# Altium PCB Mixer_8_USB_jack.PcbDoc
Units mm, origin at the board's own origin, x right, y up, seen from the top; angles counter-clockwise.
Board outline 96.08 x 38.63 mm, 2 copper layers (Top Layer, Bottom Layer); 93 components, 47 nets, 212 pads, 147 vias.
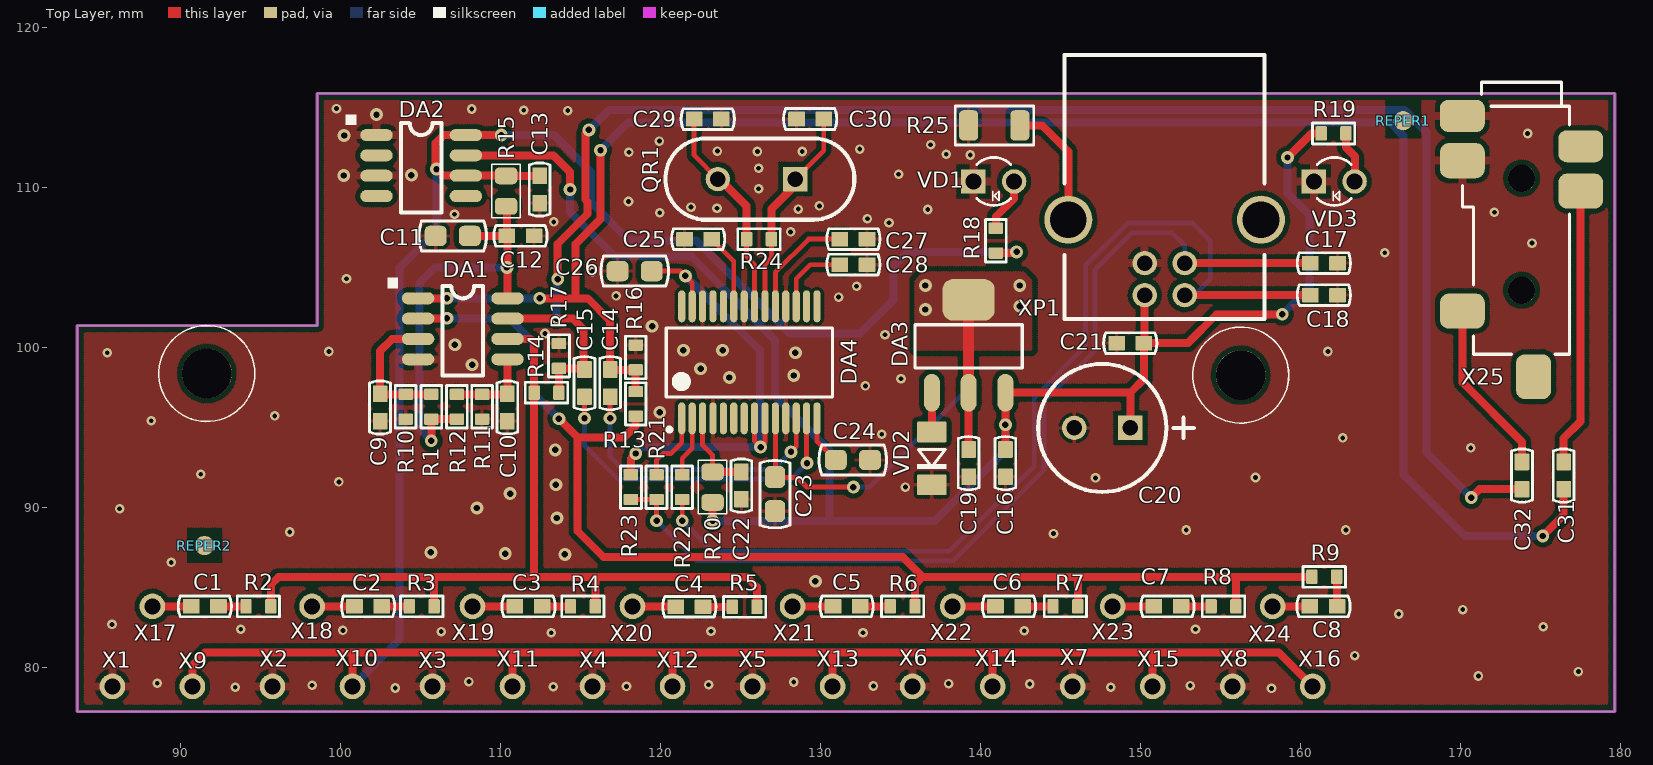
[diagram p0: Top Layer view]
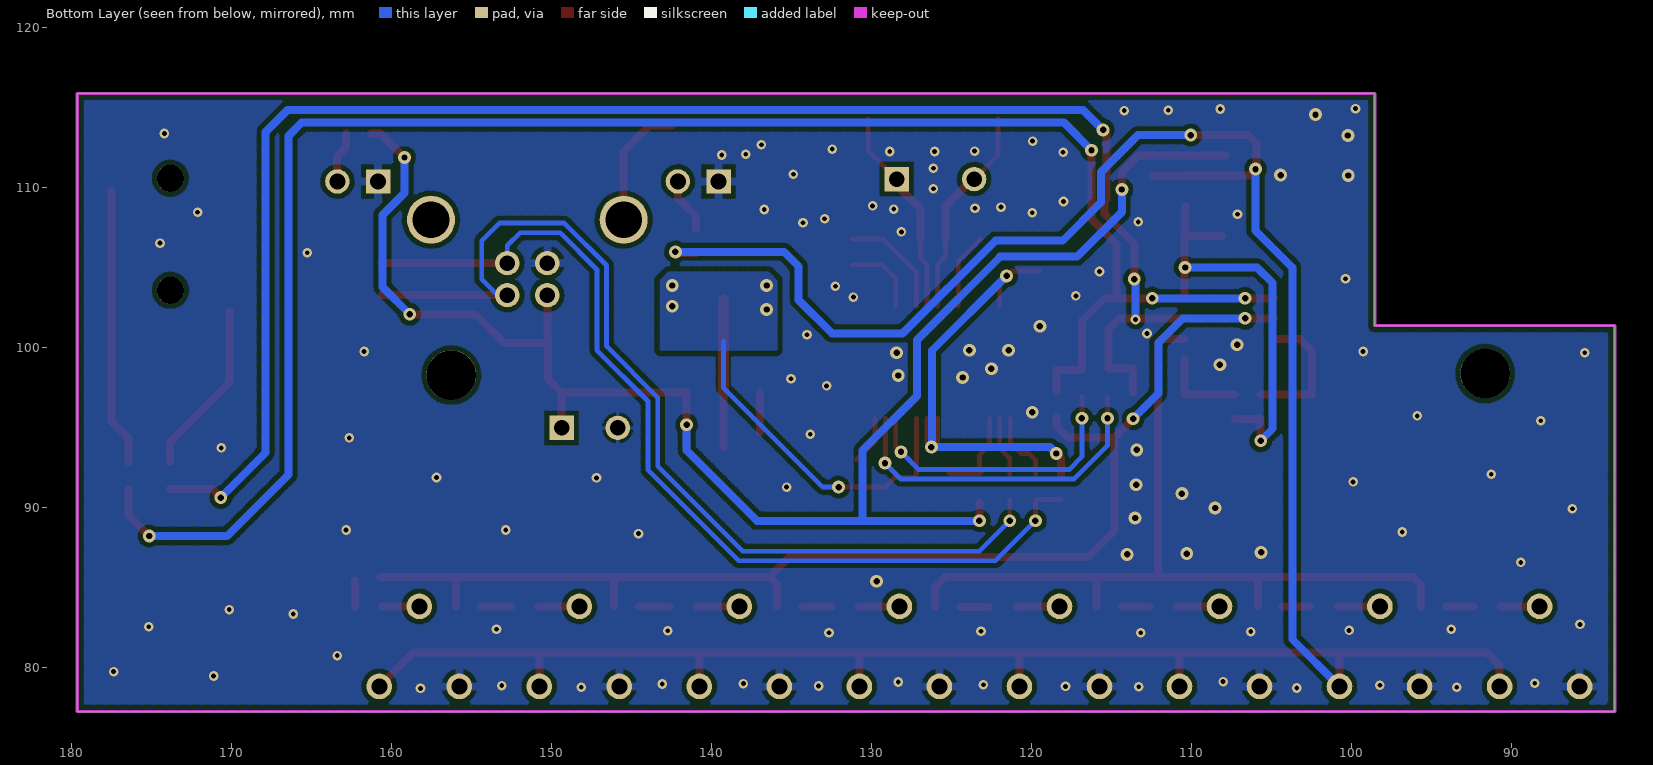
[diagram p1: Bottom Layer view, seen from below]
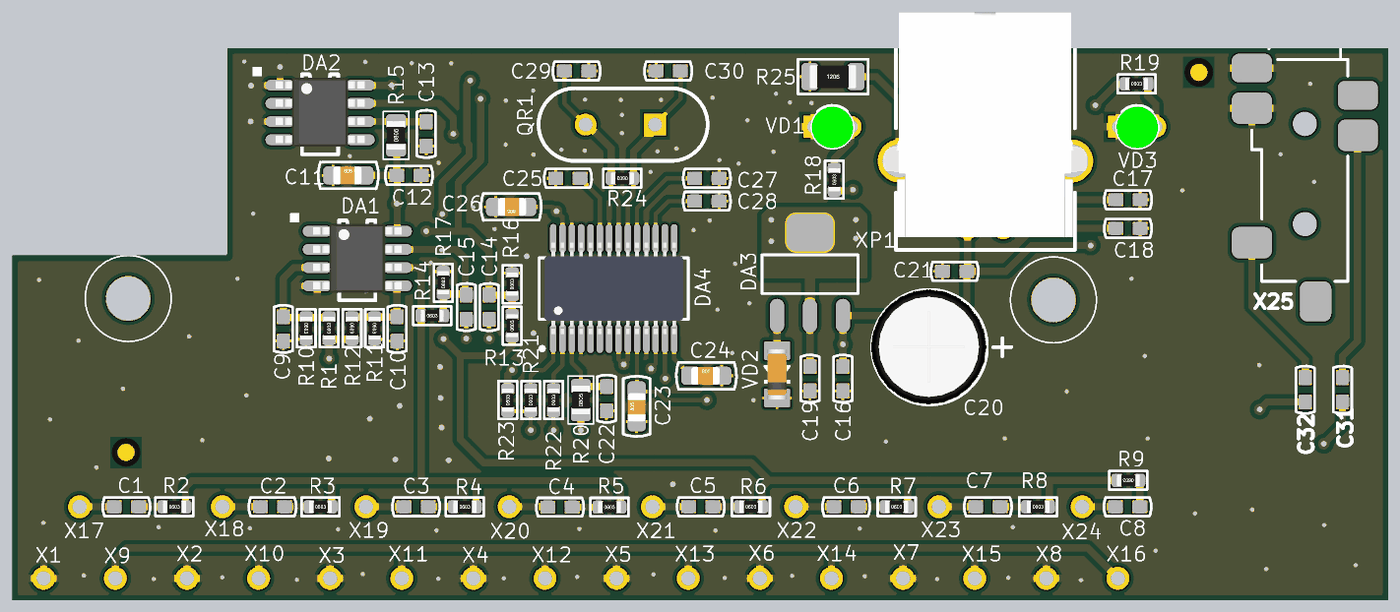
[diagram p2: 3D render of the assembled board from above, using the file's embedded part models]

## Layer stack, top to bottom
Top Solder: solder mask 0.0102, Solder Resist, Dk 3.5
Top Layer: signal copper 0.0356
Dielectric 1: dielectric 0.32, FR-4, Dk 4.8
Bottom Layer: signal copper 0.0356
Bottom Solder: solder mask 0.0102, Solder Resist, Dk 3.5

## Board outline
83.55,77.225 83.55,101.35 98.55,101.35 98.55,115.85 179.625,115.85 179.625,77.225

## Design rules (kind name [scope] priority, off if disabled: settings)
Clearance Clearance_1 [InComponent('DA4')] p1: gap=0.2
Clearance [All] p2: gap=0.3
PolygonConnect PolygonConnect_3 [InComponent('DA4')] p1: connectstyle=Relief reliefconductorwidth=0.25 reliefentries=4 polygonreliefangle="90 Angle" airgapwidth=0.25
PolygonConnect PolygonConnect_2 [InComponent('DA2') OR InComponent('DA1') OR InComponent('VD1') OR InComponent('VD3') OR InComponent('XP1') OR InComponent('X1') OR InComponent('X2') OR InComponent('X3') OR InComponent('X4') OR InComponent('X5') OR InComponent('X6') OR InComponent('X7') OR InComponent('X8') OR InComponent('X25')] p2: connectstyle=Relief reliefconductorwidth=0.5 reliefentries=4 polygonreliefangle="90 Angle" airgapwidth=0.3
PolygonConnect PolygonConnect_1 [IsVia OR (InComponent('DA3') AND InNet('+3V5'))] p3: connectstyle=Direct reliefconductorwidth=0.254 reliefentries=4 polygonreliefangle="90 Angle" airgapwidth=0.254
PolygonConnect [All] p4: connectstyle=Relief reliefconductorwidth=0.2 reliefentries=4 polygonreliefangle="90 Angle" airgapwidth=0.2
RoutingVias [All] p1: holewidth=0.4 width=0.8 viastyle="Through Hole" minholewidth=0.3 minwidth=0.6 maxholewidth=0.5 maxwidth=1
SolderMaskExpansion [All] p1: expansion=0.102
Width [All] p1: maxlimit=3 minlimit=0.2 preferedwidth=0.5
30 further rules are at their usual default settings.

## Classes and differential pairs
component class USB: C16 C17 C18 C19 C20 C21 C22 C23 C24 C25 C26 C27 C28 C29 C30 DA3 DA4 QR1 R19 R20 R21 R22 R23 R24 R25 VD2 VD3 XP1
component class Analog_out: C1 C2 C3 C4 C5 C6 C7 C8 C9 C10 C11 C12 C13 C14 C15 C31 C32 DA1 DA2 R1 R2 R3 R4 R5 R6 R7 R8 R9 R10 R11 R12 R13 R14 R15 R16 R17 R18 REPER1 REPER2 VD1 X1 X2 X3 X4 X5 X6 X7 X8 X9 X10 X11 X12 X13 X14 X15 X16 X17 X18 X19 X20 X21 X22 X23 X24 X25

## Components (designator, comment, footprint, x,y, rotation, side; value= is the part's Value field where it differs from the comment)
C1 "0.1uFx50V" CC0603-3M 91.525,83.8 r0 top
C2 "0.1uFx50V" CC0603-3M 101.725,83.8 r0 top
C3 "0.1uFx50V" CC0603-3M 111.75,83.8 r0 top
C4 "0.1uFx50V" CC0603-3M 121.8,83.775 r0 top
C5 "0.1uFx50V" CC0603-3M 131.625,83.8 r0 top
C6 "0.1uFx50V" CC0603-3M 141.775,83.8 r0 top
C7 "0.1uFx50V" CC0603-3M 151.675,83.8 r0 top
C8 "0.1uFx50V" CC0603-3M 161.425,83.8 r0 top
C9 "1uFx50V" CC0603-3M 102.475,96.225 r90 top
C10 "1uFx50V" CC0603-3M 110.425,96.225 r90 top
C11 "10uF" CC0805-MIDI-2M1 105.95,106.95 r0 top
C12 "0.1uF" CC0603-3M 111.25,106.95 r180 top
C13 "0.1uF" CC0603-3M 112.45,109.85 r90 top
C14 "1uFx50V" CC0603-3M 116.85,97.75 r270 top
C15 "1uFx50V" CC0603-3M 115.25,97.75 r270 top
C16 "0.1uF" CC0603-3M 141.55,92.75 r90 top
C17 "22pF" CC0603-3M 161.45,105.25 r180 top
C18 "22pF" CC0603-3M 161.45,103.25 r180 top
C19 "0.1uF" CC0603-3M 139.25,92.75 r90 top
C20 "470uFx10V" CC8X3.5 149.35,94.95 r180 top
C21 "0.1uF" CC0603-3M 149.35,100.25 r0 top
C22 "1uF" CC0603-3M 125.05,91.35 r90 top
C23 "10uF" CC0805-MIDI-2M1 127.15,89.75 r90 top
C24 "10uF" CC0805-MIDI-2M1 130.95,92.95 r0 top
C25 "1uF" CC0603-3M 122.35,106.75 r180 top
C26 "10uF" CC0805-MIDI-2M1 119.45,104.75 r180 top
C27 "1uF" CC0603-3M 132.05,106.748 r0 top
C28 "1uF" CC0603-3M 132.05,105.15 r0 top
C29 "22pF" CC0603-3M 122.95,114.25 r180 top
C30 "22pF" CC0603-3M 129.35,114.25 r0 top
C31 "1uFx50V" CC0603-3M 176.425,91.975 r90 top
C32 "1uFx50V" CC0603-3M 173.825,91.975 r90 top
DA1 "LM358D" SO-8 104.85,103.05 r270 top
DA2 "MIC2025-2BM" SO-8 102.25,113.25 r270 top
DA3 "NCP1117ST" SOT-223 139.25,100.05 r0 top
DA4 "PCM2904" TSSOP28 125.55,99.05 r90 top
QR1 "12MHz" HC-49 128.425,110.5 r180 top
R1 "12k" RC0603-3M 105.675,96.274 r90 top
R2 "12k" RC0603-3M 94.875,83.8 r0 top
R3 "12k" RC0603-3M 105.075,83.8 r0 top
R4 "12k" RC0603-3M 115.15,83.8 r0 top
R5 "12k" RC0603-3M 125.25,83.775 r0 top
R6 "12k" RC0603-3M 135.125,83.8 r0 top
R7 "12k" RC0603-3M 145.3,83.8 r0 top
R8 "12k" RC0603-3M 155.175,83.8 r0 top
R9 "12k" RC0603-3M 161.475,85.65 r180 top
R10 "12k" RC0603-3M 104.075,96.275 r270 top
R11 "12k" RC0603-3M 108.85,96.275 r270 top
R12 "12k" RC0603-3M 107.275,96.275 r270 top
R13 "12k" RC0603-3M 118.45,96.45 r90 top
R14 "12k" RC0603-3M 112.875,97.15 r0 top
R15 "10E" RC0805_IPC_NOM 110.35,109.75 r90 top
R16 "2k7" RC0603-3M 118.45,99.35 r90 top
R17 "2k7" RC0603-3M 113.65,99.45 r90 top
R18 "470E" RC0603-3M 140.95,106.65 r90 top
R19 "560E" RC0603-3M 162.05,113.35 r0 top
R20 "2.2E" RC0805_IPC_NOM 123.25,91.25 r90 top
R21 "22E" RC0603-3M 119.75,91.25 r90 top
R22 "22E" RC0603-3M 121.35,91.25 r90 top
R23 "1k5" RC0603-3M 118.15,91.25 r90 top
R24 "1M" RC0603-3M 126.15,106.75 r180 top
R25 "1M5" RC1206-2M 139.25,113.85 r0 top
REPER1 "REPER1.2" REPER1.2 166.4,114.15 r90 top
REPER2 "REPER1.2" REPER1.2 91.5,87.6 r90 top
VD1 "BL-B21V1F" LED3 139.55,110.35 r0 top
VD2 "LL4148" SOD-80 136.95,93.05 r90 top
VD3 "BL-B45V1F" LED3 160.825,110.35 r0 top
X1 "PIN_1mm" PIN_1mm 85.75,78.8 r0 top
X2 "PIN_1mm" PIN_1mm 95.75,78.8 r0 top
X3 "PIN_1mm" PIN_1mm 105.75,78.8 r0 top
X4 "PIN_1mm" PIN_1mm 115.75,78.8 r0 top
X5 "PIN_1mm" PIN_1mm 125.75,78.8 r0 top
X6 "PIN_1mm" PIN_1mm 135.75,78.8 r0 top
X7 "PIN_1mm" PIN_1mm 145.75,78.8 r0 top
X8 "PIN_1mm" PIN_1mm 155.75,78.8 r0 top
X9 "PIN_1mm" PIN_1mm 90.75,78.8 r0 top
X10 "PIN_1mm" PIN_1mm 100.75,78.8 r0 top
X11 "PIN_1mm" PIN_1mm 110.75,78.8 r0 top
X12 "PIN_1mm" PIN_1mm 120.75,78.8 r0 top
X13 "PIN_1mm" PIN_1mm 130.75,78.8 r0 top
X14 "PIN_1mm" PIN_1mm 140.75,78.8 r0 top
X15 "PIN_1mm" PIN_1mm 150.75,78.8 r0 top
X16 "PIN_1mm" PIN_1mm 160.75,78.8 r0 top
X17 "PIN_1mm" PIN_1mm 88.25,83.8 r0 top
X18 "PIN_1mm" PIN_1mm 98.225,83.8 r0 top
X19 "PIN_1mm" PIN_1mm 108.25,83.8 r0 top
X20 "PIN_1mm" PIN_1mm 118.25,83.8 r90 top
X21 "PIN_1mm" PIN_1mm 128.25,83.8 r0 top
X22 "PIN_1mm" PIN_1mm 138.25,83.8 r90 top
X23 "PIN_1mm" PIN_1mm 148.25,83.8 r90 top
X24 "PIN_1mm" PIN_1mm 158.25,83.8 r90 top
X25 "SJ-43516-SMT" SJ-43516-SMT 170.1,114.45 r270 top
XP1 "USB_B" USB-B 150.25,103.25 r270 top

## Footprints (in the part's own frame and the unit in brackets; to place one, negate y for a bottom-side part, rotate by r counter-clockwise, add the part's x,y. Pads: shape width x height; smd on the part's side, far side on the other; paste and mask are expansions set on the pad)
CC8X3.5 [mil]
  rect 60x60 hole 38: 1(0,0)
  round 60 hole 38: 2(137.8,0)
  silkscreen extent -156,-157 226,157, body extent -88,-159 229,158, height 493
CC0603-3M [mil]
  rrect10% 40.98x35.98 smd paste-1000: 1(-33.5,0) 2(33.5,0)
  silkscreen extent -65,-26 65,26, body extent -31,-16 32,16, height 12
CC0805-MIDI-2M1 [mil]
  rrect50% 54x50 smd: 1(0,0) 2(84,0)
  silkscreen extent -41,-37 125,37, body extent 0,-25 79,25, height 29
HC-49 [mil]
  rect 60x60 hole 38: 1(0,0)
  round 60 hole 38: 2(190.55,0)
  silkscreen extent -145,-100 320,100
LED3 [mil]
  rect 60x60 hole 39: 1(0,0)
  round 60 hole 39: 2(100,0)
  silkscreen extent 8,-59 92,59, body extent -12,-63 112,59, height 295
PIN_1mm [mm]
  round 1.6 hole 1: 1(0,0)
RC0603-3M [mm]
  rrect20% 0.71x0.91 smd paste-25.4: 1(-0.775,0) 2(0.775,0)
  silkscreen extent -1.32,-0.65 1.33,0.65, body extent -0.8,-0.4 0.8,0.4, height 0.45
RC0805_IPC_NOM [mm]
  rrect50% 1.05x1.4 smd: 1(-0.95,0) 2(0.95,0)
  silkscreen extent -1.67,-0.89 1.67,0.89, body extent -1,-0.62 1,0.63, height 0.6
RC1206-2M [mm]
  rrect50% 1.2x1.9 smd: 1(0,0) 2(3.2,0)
  silkscreen extent -0.84,-1.22 4.06,1.22, body extent 0,-0.8 3.2,0.8, height 0.6
REPER1.2 [mm]
  round 1.2 smd paste-25.4 mask-25.4: 1(0,0)
  Top Layer pour cut-out: -1.2,-1.2 1.2,-1.2 1.2,1.2 -1.2,1.2
SJ-43516-SMT [mm]
  rrect50% 2x2.8 smd: 1(0,0) 6(1.9,7.4)
  rrect50% 2.2x2.8 smd: 2(12.2,0) 3(4.7,7.4) 4(2.8,0)
  rrect50% 2.8x2.2 smd: 5(16.3,4.45)
  round 1.7 hole 1.7 unplated: 7(3.9,3.7) 8(10.9,3.7)
  silkscreen extent -2.1,0 14.9,6.7
SO-8 [mil]
  oval 29.53x80 smd: 1(0,0) 2(50,0) 3(100,0) 4(150,0) 5(150,220) 6(100,220) 7(50,220) 8(0,220)
  silkscreen extent -50,-75 190,160, body extent -21,-12 169,232, height 67
SOD-80 [mm]
  rrect10% 1.3x1.83 smd paste-25.4: 1(1.651,0) 2(-1.651,0)
  silkscreen extent -0.66,-0.91 0.56,0.91, body extent -1.75,-0.69 1.75,0.71, height 1.4
SOT-223 [mm]
  oval 1x2.35 smd: 1(-2.3,-2.9) 2(0,-2.9) 3(2.3,-2.9)
  rrect50% 3.25x2.6 smd: 4(0,2.9)
  silkscreen extent -3.35,-1.35 3.35,1.35
TSSOP28 [mm]
  oval 2x0.45 smd: 1(-3.5,4.225) 2(-3.5,3.575) 3(-3.5,2.925) 4(-3.5,2.275) 5(-3.5,1.625) 6(-3.5,0.975) 7(-3.5,0.325) 8(-3.5,-0.325) 9(-3.5,-0.975) 10(-3.5,-1.625) 11(-3.5,-2.275) 12(-3.5,-2.925) 13(-3.5,-3.575) 14(-3.5,-4.225) 15(3.5,-4.225) 16(3.5,-3.575) 17(3.5,-2.925) 18(3.5,-2.275) 19(3.5,-1.625) 20(3.5,-0.975) 21(3.5,-0.325) 22(3.5,0.325) 23(3.5,0.975) 24(3.5,1.625) 25(3.5,2.275) 26(3.5,2.925) 27(3.5,3.575) 28(3.5,4.225)
  silkscreen extent -4.32,-5.2 2.14,5.2, body extent -3.2,-4.85 3.2,4.85, height 0.97
USB-B [mm]
  round 1.524 hole 0.965: 1(0,0) 2(0,2.5) 3(-2,2.5) 4(-2,0)
  round 3 hole 2.3: 5(-4.71,7.27) 6(-4.71,-4.77)
  silkscreen extent -14.99,-5 1.5,7.5, body extent -15.1,-5.97 0.6,8.42, height 11.5

## Part data
C1 C2 C3 C4 C5 C6 C7 C8 C9 C10 C14 C15 C31 C32: library part CC0603, "CC0603 X7R"
C11 C23 C24 C26: library part CC0805, "CC0805"
C12 C13 C16 C17 C18 C19 C21 C22 C25 C27 C28 C29 C30: library part CC0603, "CC0603"
C20: library part CAP0.35, "CAP0.35"
QR1: library part LP-3.5, "LP-3.5"
R1 R2 R3 R4 R5 R6 R7 R8 R9 R10 R11 R12 R13 R14 R16 R17 R18 R19 R21 R22 R23 R24: library part RC0603, "RC0603"
R15 R20: library part RC0805, "RC0805"
R25: library part RC1206, "RC1206"
VD1 VD3: library part LED_3, "LED_3"
X25: "3.5mm connector 4 conductors"

## Free pads (board coordinates)
  round 3.1 hole 3.1: 0(91.65,98.35) 0(156.25,98.25)

## Via types
v1: diameter 0.6, hole 0.3, Top Layer to Bottom Layer, 91 vias
v2: diameter 0.8, hole 0.4, Top Layer to Bottom Layer, 56 vias

## Nets (pads, with @x,y where several pads share a name; then routed paths per layer and width w, separated by ;. In a path a pad name is that pad's centre, name@x,y a point inside that pad or via, vN(x,y) a via of type N, cw(c..) or ccw(c..) an arc to the next point about the centre after c; other vN are vias at no path point)
+3V5: C19.2 C23.2 DA3.2 DA3.4 DA4.10 | length 30.6
  Top Layer w0.3: DA4.10 127.175,92.059 127.384,91.85 128.55,91.85 129.15,91.25 v2(132.05,91.25)
  Top Layer w0.5: C19.2@139.25,93.75 DA3.2
  Top Layer w0.7: DA3.2 DA3.4
  Bottom Layer w0.3: v2(132.05,91.25) 133.05,91.25 139.25,97.45 139.25,100.35
  other v2: 136.55,102.35 142.45,102.55 136.55,103.85 142.45,103.85
+5V: C16.2 C20.1 C21.2 DA2.7 DA3.3 R19.1 R20.1 XP1.1 | length 104.3
  Top Layer w0.5: DA2.7 113.32,111.98 114.35,110.95 v2(114.35,109.85) ; v2(123.25,89.15) R20.1 ; C16.2@141.55,93.65 DA3.3 149.35,97.15 ; C20.1 149.35,97.15 ; XP1.1 150.25,100.299 C21.2 ; v2(158.85,102.05) 154.75,102.05 152.95,100.25 C21.2 ; v2(159.175,111.85) 160.675,113.35 R19.1 ; 149.35,97.15 150.201,98.001 C21.2
  Bottom Layer w0.5: v2(114.35,109.85) 114.35,108.45 117.15,105.65 121.95,105.65 127.15,100.45 127.15,96.95 130.55,93.55 130.55,89.15 ; v2(123.25,89.15) 130.55,89.15 ; v2(141.55,95.15) 141.55,93.55 137.15,89.15 130.55,89.15 ; v2(158.85,102.05) 160.55,103.75 160.55,108.25 159.175,109.625 v2(159.175,111.85)
GND: C9.1 C10.1 C11.1 C12.1 C13.1 C16.1 C17.1 C18.1 C19.1 C20.2 C21.1 C22.1 C23.1 C24.2 C25.2 C26.2 C27.2 C28.2 C29.1 C30.1 DA1.4 DA2.1 DA2.3 DA4.4 DA4.11 DA4.18 DA4.22 DA4.26 R10.2 R11.2 R16.2 R17.2 R25.1 VD1.1 VD2.2 VD3.1 X1.1 X2.1 X3.1 X4.1 X5.1 X6.1 X7.1 X8.1 X25.1 X25.4 XP1.4
  other v1: 158.175,78.675 103.425,78.7 93.425,78.75 148.125,78.75 113.3,78.775 117.875,78.8 133.3,78.825 153.1,78.85 98.225,78.875 123,78.9 143.075,78.95 138,78.975 88.55,79 128.325,79.075 108.025,79.1 171.1,79.45 177.35,79.725 163.375,80.725 113.175,82.15 132.65,82.15 106.3,82.225 123.15,82.247 142.725,82.275 100.15,82.3 93.775,82.375 153.425,82.375 175.15,82.525 85.725,82.675 166.125,83.325 170.125,83.6 89.425,86.55 144.55,88.35 96.825,88.45 152.85,88.575 162.825,88.575 86.2,89.9 135.3,91.25 99.9,91.575 147.175,91.825 157.175,91.85 91.275,92.05 170.625,93.7 162.625,94.325 133.825,94.55 88.175,95.4 95.9,95.7 132.8,97.575 135.025,98.025 85.425,99.65 99.275,99.725 161.7,99.725 134.025,100.775 112.782,100.85 131.125,103.125 117.225,103.2 132.25,103.8 100.375,104.275 115.75,104.725 165.25,105.9 174.45,106.5 128.125,107.2 134.275,107.775 113.325,107.825 132.925,108.025 107.125,108.3 119.95,108.4 172.1,108.425 136.7,108.6 128.6,108.625 123.525,108.675 121.9,108.75 129.925,108.825 118,109.1 126.125,109.9 134.875,110.8 126.125,111.175 139.35,112.006 137.85,112.05 118.025,112.175 126.05,112.225 128.85,112.225 123.55,112.25 132.45,112.375 136.875,112.65 119.925,112.875 174.175,113.35 114.2,114.775 111.45,114.8 108.2,114.875 99.75,114.9
  other v2: 129.675,85.375 114.025,87.05 110.3,87.1 105.65,87.175 113.525,89.325 108.525,89.95 110.6,90.85 113.463,91.4 113.425,93.575 119.95,95.925 124.3,98.1 128.325,98.225 122.5,98.65 108.225,98.9 128.425,99.65 121.425,99.8 123.875,99.8 107.15,100.15 119.475,101.3 100.2,110.725 104.429,110.75 100.225,113.225 102.25,114.525
NetC1_1: C1.1 X17.1 | length 2.4
  Top Layer w0.5: X17.1 C1.1
NetC1_2: C1.2 R2.1 | length 1.7
  Top Layer w0.5: C1.2 R2.1
NetC2_1: C2.1 X18.1 | length 2.6
  Top Layer w0.5: X18.1 C2.1
NetC2_2: C2.2 R3.1 | length 1.7
  Top Layer w0.5: C2.2 R3.1
NetC3_1: C3.1 X19.1 | length 2.6
  Top Layer w0.5: X19.1 C3.1
NetC3_2: C3.2 R4.1 | length 1.8
  Top Layer w0.5: C3.2 R4.1
NetC4_1: C4.1 X20.1 | length 2.7
  Top Layer w0.5: X20.1 120.924,83.8 C4.1
NetC4_2: C4.2 R5.1 | length 1.8
  Top Layer w0.5: C4.2 R5.1
NetC5_1: C5.1 X21.1 | length 2.5
  Top Layer w0.5: X21.1 C5.1
NetC5_2: C5.2 R6.1 | length 1.9
  Top Layer w0.5: C5.2 R6.1
NetC6_1: C6.1 X22.1 | length 2.7
  Top Layer w0.5: X22.1 C6.1
NetC6_2: C6.2 R7.1 | length 1.9
  Top Layer w0.5: C6.2 R7.1
NetC7_1: C7.1 X23.1 | length 2.6
  Top Layer w0.5: X23.1 C7.1
NetC7_2: C7.2 R8.1 | length 1.9
  Top Layer w0.5: C7.2 R8.1
NetC8_1: C8.1 X24.1 | length 2.3
  Top Layer w0.5: X24.1 C8.1
NetC8_2: C8.2 R9.1 | length 1.6
  Top Layer w0.5: R9.1@162.275,85.425 162.276,85.424 C8.2
NetC9_2: C9.2 DA1.3 R1.2 R10.1 | length 8.6
  Top Layer w0.5: DA1.3 103.235,100.51 102.475,99.75 102.475,97.026 R1.2@105.674,97.026
NetC10_2: C10.2 DA1.5 R11.1 R12.1 | length 5.3
  Top Layer w0.5: R12.1 R11.1 110.399,97.05 C10.2 110.425,99.227 DA1.5
NetC14_1: C14.1 C31.1 DA1.1 R13.2 R16.1 | length 114.6
  Top Layer w0.5: DA1.1 v2(106.65,103.05) ; v2(112.45,103.05) 114.7,103.05 ; v2(116.25,112.3) 116.25,108 114.7,106.45 114.7,103.05 ; R13.2 R16.1 116.876,98.575 C14.1 116.85,101.65 115.45,103.05 114.7,103.05 ; v2(175.125,88.2) 176.425,89.5 C31.1
  Bottom Layer w0.5: v2(106.65,103.05) v2(112.45,103.05) ; v2(116.25,112.3) 117.975,114.025 165.6,114.025 166.425,113.2 166.425,92.025 170.25,88.2 v2(175.125,88.2)
NetC14_2: C14.2 DA4.12 | length 18.1
  Top Layer w0.3: v2(116.85,95.55) C14.2 ; v2(128.15,93.45) 128.475,93.775 DA4.12
  Bottom Layer w0.3: v2(116.85,95.55) 116.85,93.15 117.65,92.35 127.05,92.35 v2(128.15,93.45)
NetC15_1: C15.1 C32.1 DA1.7 R14.2 R17.1 | length 104.1
  Top Layer w0.5: DA1.7 114.52,101.78 115.176,101.124 115.176,98.675 R17.1 R14.2 ; v2(113.575,104.25) 113.575,106.456 115.45,108.331 115.45,109.075 115.3,109.225 115.3,113.35 v2(115.525,113.575) ; v2(170.65,90.6) 171.174,91.124 C32.1
  Bottom Layer w0.5: v1(113.5,101.725) 113.5,104.175 v2(113.575,104.25) ; v2(115.525,113.575) 116.775,114.825 166.475,114.825 167.85,113.45 167.85,93.4 v2(170.65,90.6)
NetC15_2: C15.2 DA4.13 | length 20.9
  Top Layer w0.3: v2(115.25,95.55) C15.2 ; v2@129.125,92.975 DA4.13
  Bottom Layer w0.3: v2@115.25,95.65 v2(115.25,95.55) 115.25,93.85 117.35,91.75 128.15,91.75 v2(129.15,92.75)
NetC17_2: C17.2 R21.1 R23.1 XP1.3 | length 60.2
  Top Layer w0.3: R23.1 R21.1 v2(119.75,89.15)
  Top Layer w0.5: XP1.3 C17.2
  Bottom Layer w0.3: v2(119.75,89.15) 122.25,86.65 138.299,86.65 143.95,92.301 143.95,96.601 147.15,99.801 147.15,104.85 149.45,107.15 151.95,107.15 152.75,106.35 XP1.3
NetC18_2: C18.2 R22.1 XP1.2 | length 61.8
  Top Layer w0.3: v2(121.35,89.15) R22.1
  Top Layer w0.5: XP1.2 C18.2
  Bottom Layer w0.3: v2(121.35,89.15) 123.25,87.25 138.05,87.25 143.35,92.55 143.35,96.85 146.55,100.05 146.55,105.099 149.201,107.75 153.25,107.75 154.35,106.65 154.35,104.25 153.35,103.25 XP1.2
NetC22_2: C22.2 DA4.3 R20.2 | length 5.4
  Top Layer w0.3: DA4.3 122.625,93.875 123.25,93.25 R20.2
  Top Layer w0.5: R20.2 125.049,92.2 C22.2
NetC24_1: C24.1 DA4.14 | length 3.1
  Top Layer w0.3: DA4.14 129.775,94.125 C24.1
NetC25_1: C25.1 DA4.23 | length 4.8
  Top Layer w0.3: C25.1 124.575,105.376 DA4.23
NetC26_1: C26.1 DA4.8 DA4.9 DA4.27 R23.2 | length 30.2
  Top Layer w0.3: C26.1 121.25,104.75 121.975,104.025 DA4.27 ; DA4.8 125.875,94.125 v2(126.25,93.75) 126.525,94.025 DA4.9
  Top Layer w0.5: R23.2 118.15,93.05 v2(118.45,93.35)
  Bottom Layer w0.5: v2(118.45,93.35) 118.85,93.75 v2(126.25,93.75) 126.2,93.8 126.2,99.8 v2(121.55,104.45)
NetC27_1: C27.1 DA4.19 | length 7
  Top Layer w0.3: DA4.19 127.175,104.675 129.25,106.75 C27.1@131.199,106.75
NetC28_1: C28.1 DA4.17 | length 4.8
  Top Layer w0.3: DA4.17 128.475,104.275 129.35,105.15 C28.1
NetC29_2: C29.2 DA4.21 QR1.2 R24.2 | length 13.1
  Top Layer w0.3: C29.2 122.099,111.986 QR1.2 ; R24.2 125.375,105.65 125.875,105.15 DA4.21
  Top Layer w0.5: QR1.2@123.75,110.45 125.375,108.825 R24.2
NetC30_2: C30.2 DA4.20 QR1.1 R24.1 | length 13.1
  Top Layer w0.3: DA4.20 126.525,105.15 126.925,105.55 R24.1 ; QR1.1 130.201,112.276 C30.2
  Top Layer w0.5: R24.1 126.925,108.625 QR1.1@128.613,110.312
NetC31_2: C31.2 X25.3 | length 17.4
  Top Layer w0.5: C31.2 176.425,94.3 177.475,95.35 177.475,109.725 X25.3
NetC32_2: C32.2 X25.2 | length 11
  Top Layer w0.5: X25.2 170.1,97.8 173.825,94.075 C32.2
NetDA1_2: DA1.2 R6.2 R7.2 R8.2 R9.2 R13.1 | length 78
  Top Layer w0.5: DA1.2 106.48,101.78 v2@106.5,101.8 ; v2(113.65,95.525) 114.825,94.35 ; R13.1 118.45,95.075 117.725,94.35 114.825,94.35 ; R6.2 135.9,85.175 136.375,85.65 ; R7.2 146.075,85.65 ; R8.2 155.95,85.6 ; R9.2 136.375,85.65 ; 114.825,94.35 114.825,88.5 116.45,86.875 135.15,86.875 136.375,85.65
  Bottom Layer w0.5: v2@106.5,101.8 110.525,101.8 112.075,100.25 112.075,97.1 v2(113.65,95.525)
  other v2: 106.65,101.8
NetDA1_6: DA1.6 R2.2 R3.2 R4.2 R5.2 R14.1 | length 53.3
  Top Layer w0.5: R2.2 95.65,85.15 96.125,85.625 112.075,85.625 ; R3.2 105.85,85.55 ; DA1.6 111.865,100.51 112.1,100.275 R14.1 112.1,85.65 112.075,85.625 ; R4.2 115.925,85.55 ; R5.2 126.025,85 125.4,85.625 112.075,85.625
NetDA3_1: DA3.1 VD2.1 | length 2.4
  Top Layer w0.5: VD2.1 DA3.1
NetDA4_1: DA4.1 R21.2 | length 4.5
  Top Layer w0.3: R21.2 119.75,92.95 120.15,93.35 120.65,93.35 121.325,94.025 DA4.1
NetDA4_2: DA4.2 R22.2 | length 3.8
  Top Layer w0.3: R22.2 121.35,93.05 121.975,93.675 DA4.2
NetR18_2: R18.2 VD1.2 | length 3.4
  Top Layer w0.5: R18.2 140.95,108.15 142.09,109.29 VD1.2
NetR19_2: R19.2 VD3.2 | length 3.3
  Top Layer w0.5: R19.2 162.825,112.475 163.39,111.91 163.39,110.35 VD3.2@163.35,110.31
NetR25_2: R25.2 XP1.6 | length 8
  Top Layer w0.5: R25.2 143.85,113.85 145.48,112.22 XP1.6
VCC: C11.2 C12.2 DA1.8 R1.1 R12.2 R15.1 | length 27.1
  Top Layer w0.5: v2(105.675,94.15) R1.1 R12.2@107.274,95.5 ; C11.2 C12.2 ; R15.1 110.399,108.751 C12.2 ; DA1.8 110.438,106.911 C12.2
  Bottom Layer w0.5: v2(105.675,94.15) 104.925,94.9 104.925,104 105.9,104.975 v2(110.4,104.975)
VCC_MIC: C13.2 DA2.6 DA2.8 R15.2 R18.1 X9.1 X10.1 X11.1 X12.1 X13.1 X14.1 X15.1 X16.1 | length 175.4
  Top Layer w0.5: X9.1 90.75,80.125 91.55,80.925 150.725,80.925 ; X10.1 100.75,80.9 ; v2(110.05,113.25) DA2.8 106.45,113.25 105.95,112.75 105.95,111.15 106.39,110.71 DA2.6 110.34,110.71 R15.2 112.449,110.7 C13.2 ; X11.1 110.75,80.9 ; X12.1 120.75,80.9 ; X13.1 130.75,80.9 ; X14.1 140.75,80.9 ; R18.1 142.175,105.875 v2(142.25,105.95) ; X15.1 150.75,80.9 150.725,80.925 ; X16.1 158.625,80.925 150.725,80.925
  Bottom Layer w0.5: X10.1 103.7,81.75 103.7,104.975 106,107.275 v2(106,111.125) ; v2(110.05,113.25) 113.35,113.25 115.65,110.95 115.65,109.05 118.05,106.65 122.25,106.65 128.05,100.85 132.45,100.85 134.55,102.95 134.55,105.05 135.45,105.95 v2(142.25,105.95)
pads on no net: DA2.2 DA2.4 DA2.5 DA4.5 DA4.6 DA4.7 DA4.15 DA4.16 DA4.24 DA4.25 DA4.28 REPER1.1 REPER2.1 X25.5 X25.6 X25.7 X25.8 XP1.5

## Polygon pours and split planes (outlines as drawn)
GND on Top Layer "TOP" (hatched 90Degree grid 0.15 track 0.2, remove dead copper, pour order 4): 179.625,115.85 98.55,115.85 98.55,101.35 83.55,101.35 83.55,77.225 164.55,77.225 179.625,77.225
+3V5 on Top Layer "TOVHV" (hatched 90Degree grid 0.15 track 0.2, remove dead copper, pour order 0): 139.25,99.85 135.95,99.85 135.95,104.15 136.45,104.65 141.95,104.65 142.65,104.65 143.15,104.15 143.15,99.85
GND on Bottom Layer "BOT" (hatched 90Degree grid 0.15 track 0.2, remove dead copper, pour order 6): 179.625,115.85 98.55,115.85 98.55,101.35 83.55,101.35 83.55,77.225 179.625,77.225
+3V5 on Bottom Layer "BOT3" (hatched 90Degree grid 0.15 track 0.2, remove dead copper, pour order 2): 139.25,99.85 135.95,99.85 135.95,104.15 136.45,104.65 141.95,104.65 142.65,104.65 143.15,104.15 143.15,99.85

## Keep-outs
Keep-Out Layer:
  the board outline again, w0.2

## Silkscreen, mask and mechanical layers (free items; w line width, h text height)
Top Overlay:
  circle w0.1: c91.65,98.35 r3
  circle w0.1: c156.25,98.25 r3
Mechanical 3:
  rectangle: 136.6,59.425 137.725,60.625
  rectangle: 138.875,54.5 139.45,54.8
  rectangle: 138.55,54.8 139.65,56.8
  lines w0.1: 137.725,60.625 137.725,59.5 137.687,59.462 137.65,59.425 136.6,59.425 cw(c136.6,60.025) 136.6,60.625 137.725,60.625 ; 137.725,60.625 137.725,60.625
  lines w0.2: 136.825,60.025 139.125,60.025 139.125,59.2 139.125,54.325 ; 138.55,56.8 138.55,54.8 138.65,54.8 139.125,54.325 ; 139.65,56.825 139.65,54.8 139.175,54.325 139.125,54.325 ; 137.1,54.8 137.1,56.725 137.2,56.825 152.65,56.825 152.65,54.8 137.1,54.8
  text "Монтаж светодиодов VD1 и VD3" at 122.175,64.9 h3

## Dimensions
137.2,56.825 to 139.125,60.025 on Mechanical 3
137.1,54.8 to 136,60.025 on Mechanical 3